# Altium PCB I3G模块.PcbDoc
Units mil, origin at the board's own origin, x right, y up, seen from the top; angles counter-clockwise.
Board outline 1074.96 x 1138.89 mil, 2 copper layers (Top Layer, Bottom Layer); 20 components, 17 nets, 67 pads, 22 vias.
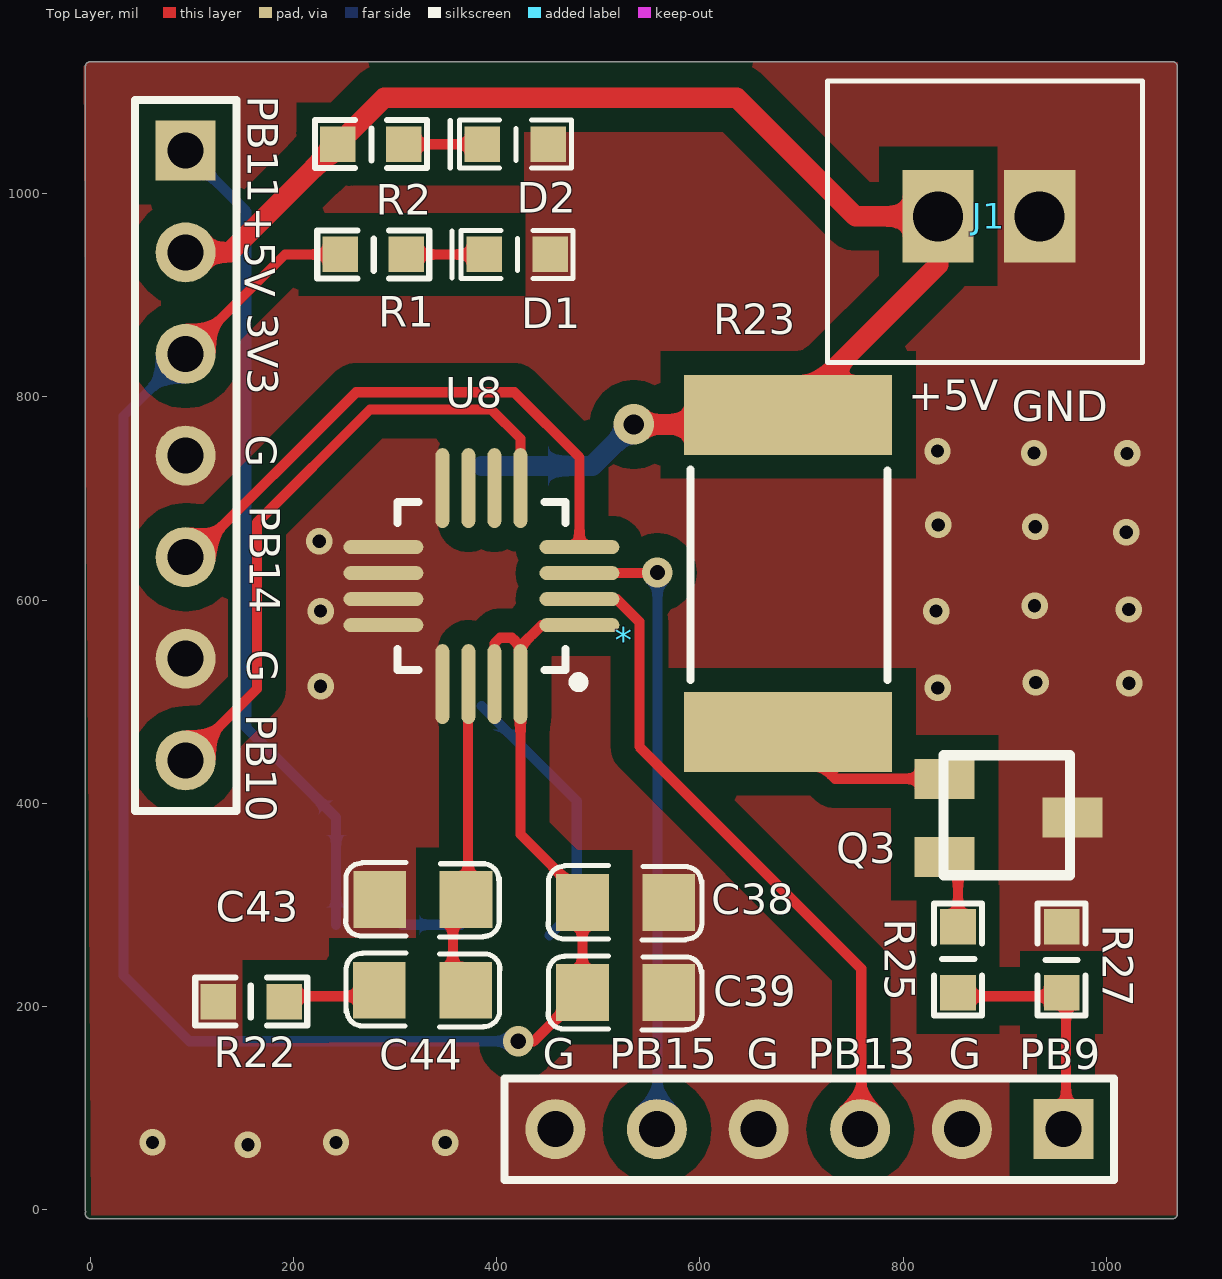
[diagram p0: Top Layer view]
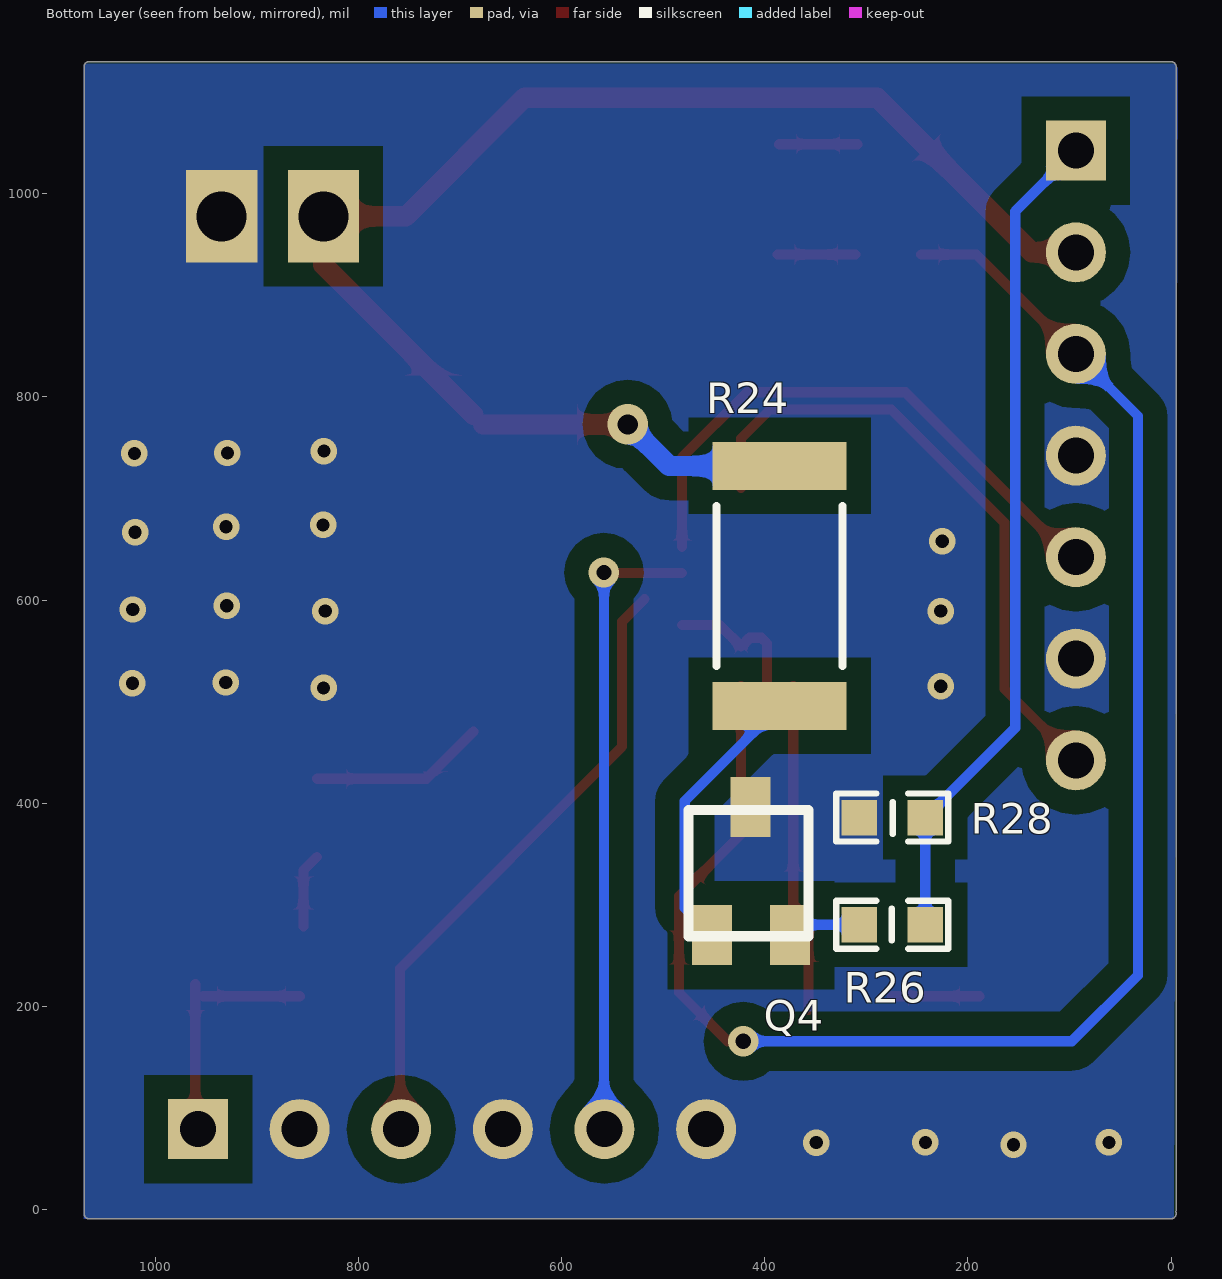
[diagram p1: Bottom Layer view, seen from below]
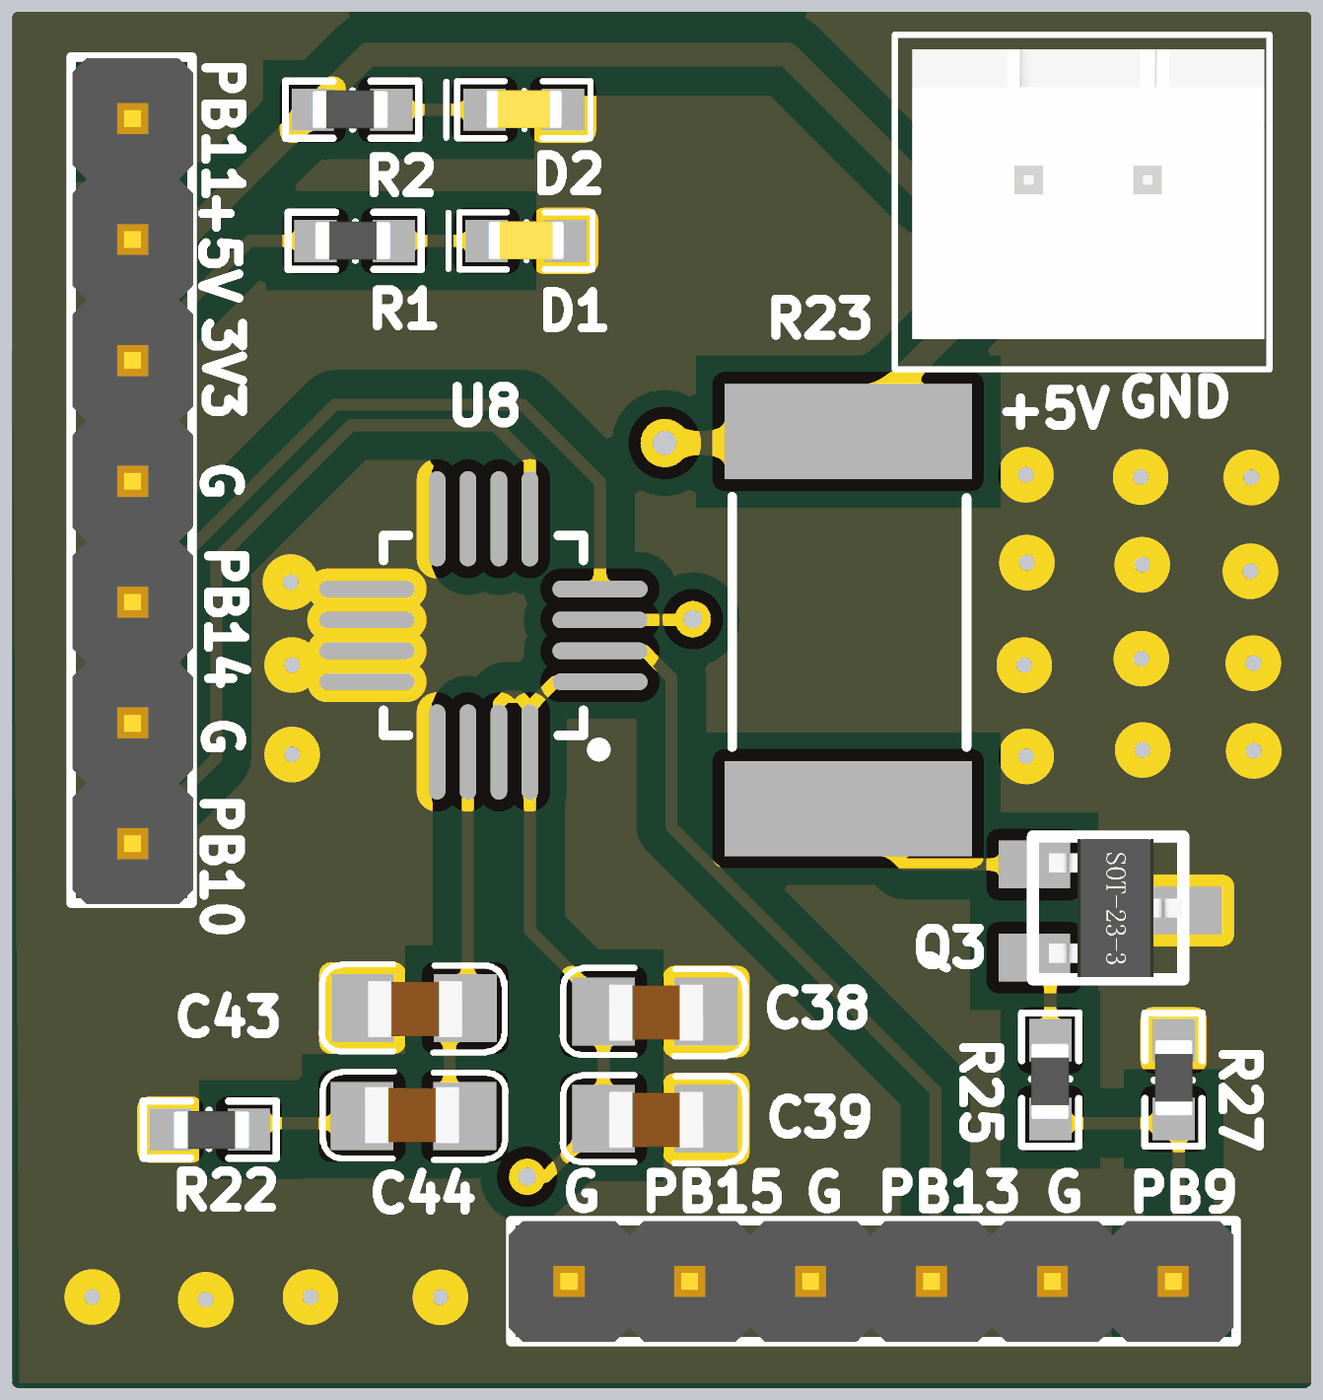
[diagram p2: 3D render of the assembled board from above, using the file's embedded part models]
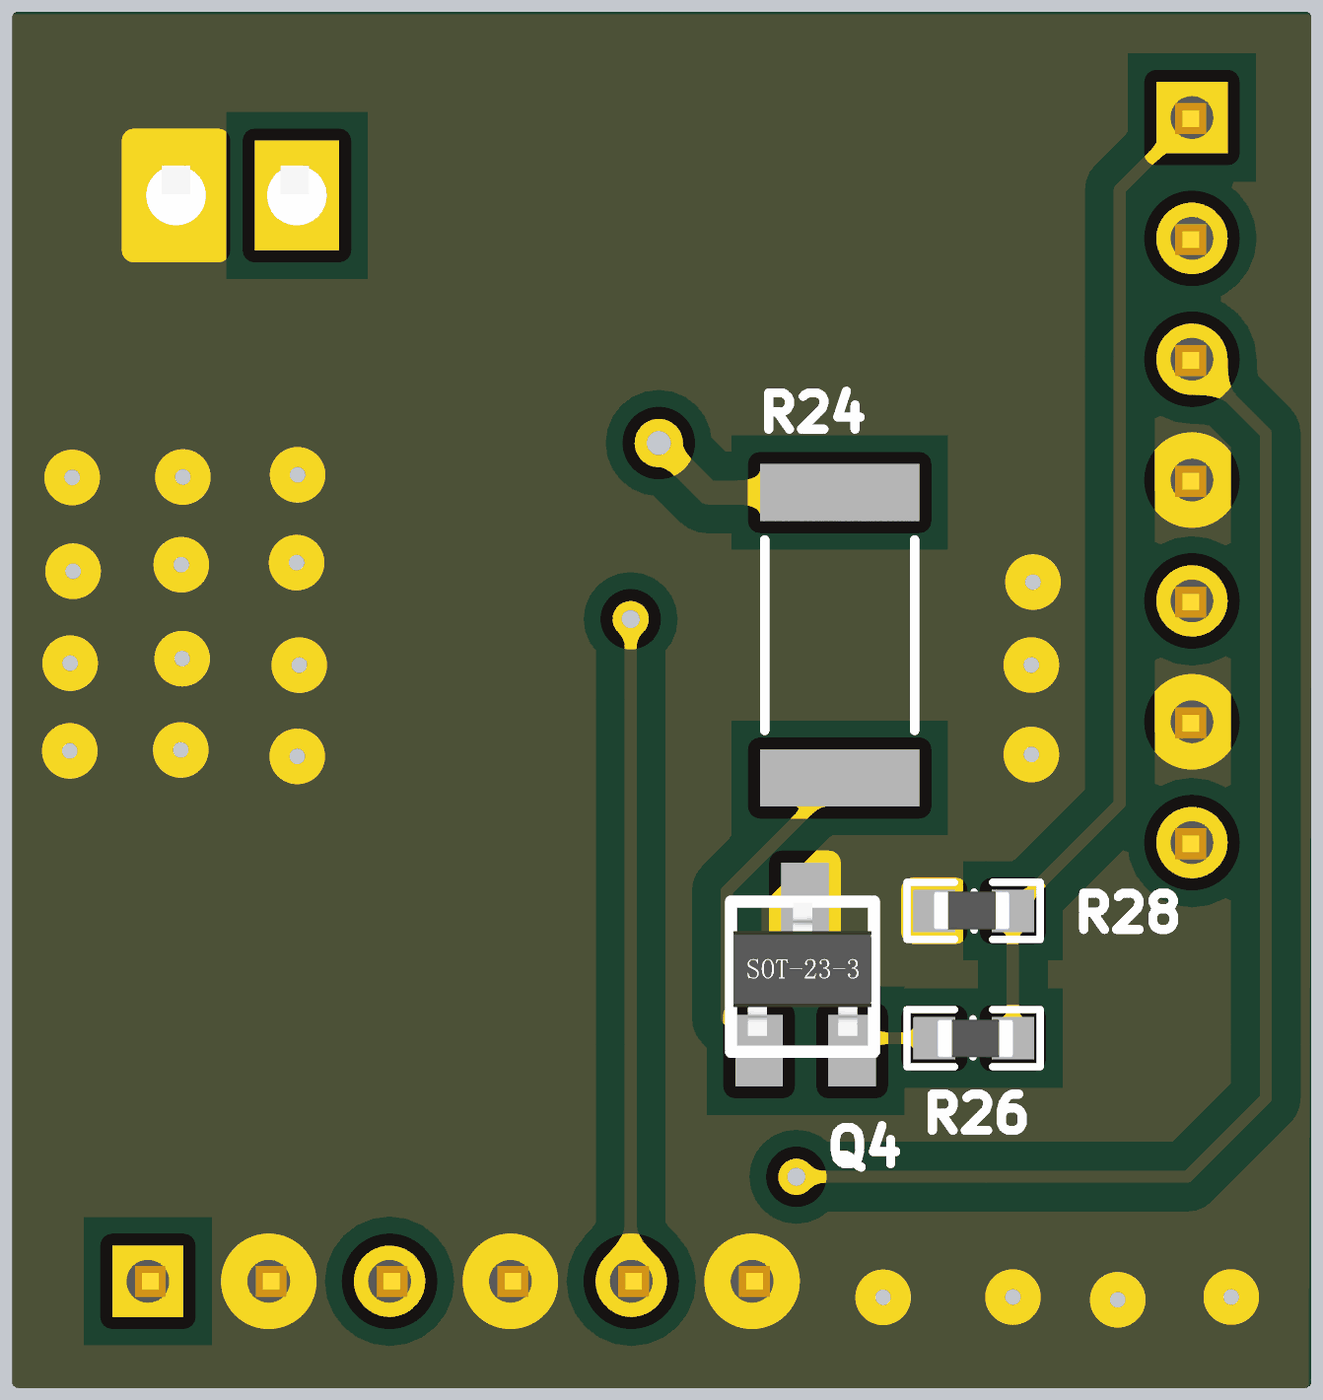
[diagram p3: 3D render of the assembled board from below, using the file's embedded part models]

## Layer stack, top to bottom
Top Solder: solder mask 0.4, Solder Resist, Dk 3.5
Top Layer: signal copper 1.4
Dielectric 1: dielectric 12.6, FR-4, Dk 4.8
Bottom Layer: signal copper 1.4
Bottom Solder: solder mask 0.4, Solder Resist, Dk 3.5

## Board outline
-4.61,-1.98 cw(c0,0) -5.01,0 -5.01,1124.89 cw(c0,1124.89) 0,1129.91 1064.93,1129.91 cw(c1064.93,1124.89) 1069.95,1124.89 1069.95,-3.97 cw(c1064.93,-3.97) 1064.93,-8.98 0,-8.98 cw(c0,-3.97)

## Design rules (kind name [scope] priority, off if disabled: settings)
Clearance [All] p1: gap=7
HoleToHoleClearance [All] p1: gap=0 allowstackedmicrovias=TRUE
MinimumSolderMaskSliver [All] p1: minsoldermaskwidth=0
PlaneClearance [All] p1: clearance=24
PlaneConnect [All] p1: planeconnectstyle=Direct reliefexpansion=20 reliefentries=4 reliefconductorwidth=10 reliefairgap=10
PolygonConnect [All] p1: connectstyle=Direct reliefconductorwidth=10 reliefentries=4 polygonreliefangle="90 Angle" airgapwidth=10
RoutingVias [All] p1: holewidth=13 width=20 viastyle="Through Hole" minholewidth=13 minwidth=20 maxholewidth=50 maxwidth=50
SilkToSilkClearance [All] p1: silktosilkclearance=0
SilkToSolderMaskClearance [IsPad] p1: minsilkscreentomaskgap=0 clearancetoexposedcopper=TRUE
SolderMaskExpansion [All] p1: expansion=10
Width [All] p1: maxlimit=20 minlimit=10 preferedwidth=10
24 further rules are at their usual default settings.

## Components (designator, comment, footprint, x,y, rotation, side; value= is the part's Value field where it differs from the comment)
* "mems小板底座" mems小板底座 193.7,42.25 r270 top
C38 "104" C-0805C 604.86,263.58 r180 top
C39 "104" C-0805C 604.86,174.87 r180 top
C43 "104" C-0805C 405.44,266.49 r180 top
C44 "104" C-0805C 248.81,254.78 r0 top
D1 "" D-0603D 361.89,966.57 r0 top
D2 "1N4148" D-0603D 360.16,1075.1 r0 top
J1 "J-2PIN" J-2-2.54-xh 987.4,974.73 r180 top
Q3 "S8050" SOT-233-3 861.71,396.12 r270 top
Q4 "S8050" SOT-233-3 423.92,291.14 r180 bottom
R1 "Value" R-0603R 220.9,965.17 r0 top
R2 "Value" R-0603R 218.64,1073.7 r0 top
R22 "10K" R-0603R 215.85,179.75 r180 top
R23 "30欧 2512" R-3925R（锰铜） 679.72,619.38 r90 top
R24 "30欧 2512" PCBComponent_1 380.02,620.37 r270 bottom
R25 "330欧" R-0603R 829.01,188.66 r90 top
R26 "330欧" R-0603R 216.93,255.45 r0 bottom
R27 "10K" R-0603R 980.98,303.66 r270 top
R28 "10K" R-0603R 331.93,410.81 r180 bottom
U8 "I3G4250D" I3G4250D 400.93,602.73 r180 top

## Footprints (in the part's own frame and the unit in brackets; to place one, negate y for a bottom-side part, rotate by r counter-clockwise, add the part's x,y. Pads: shape width x height; smd on the part's side, far side on the other; paste and mask are expansions set on the pad)
C-0805C [mil]
  rect 52x56 smd: 1(35.6,-38.84) 2(120.6,-38.84)
  silkscreen extent 3,-75 155,-2, body extent 38,-62 116,-14, height 37
D-0603D [mil]
  rect 35x35 smd: 1(25.62,-26.4) 2(90.62,-26.4)
  silkscreen extent -6,-50 113,-3, body extent 3,-50 113,-3, height 10
I3G4250D [mm]
  oval 2x0.35 smd: 1(-2.044,0.696) 2(-2.044,0.046) 3(-2.044,-0.604) 4(-2.044,-1.254) 9(2.856,-1.254) 10(2.856,-0.604) 11(2.856,0.046) 12(2.856,0.696)
  oval 0.35x2 smd: 5(-0.569,-2.729) 6(0.081,-2.729) 7(0.731,-2.729) 8(1.381,-2.729) 13(1.381,2.171) 14(0.731,2.171) 15(0.081,2.171) 16(-0.569,2.171)
  silkscreen extent -2.14,-2.38 2.51,2.25, body extent -1.67,-2.35 2.48,1.8, height 1.1
J-2-2.54-xh [mil]
  rect 70x90.75 hole 49.21: 1(53,-3) 2(153,-3)
  silkscreen extent -48,-136 262,141, body extent -44,-124 248,116, height 293
mems小板底座 [mm]
  rect 1.5x1.5 hole 0.9: 1(-25.4,-2.54) 13(-0.94,19.406)
  round 1.5 hole 0.9: 2(-22.86,-2.54) 3(-20.32,-2.54) 4(-17.78,-2.54) 5(-15.24,-2.54) 6(-12.7,-2.54) 7(-10.16,-2.54) 8(-0.94,6.706) 9(-0.94,9.246) 10(-0.94,11.786) 11(-0.94,14.326) 12(-0.94,16.866)
  silkscreen extent -26.67,-3.81 0.33,20.68, body extent -26.64,-3.78 0.33,20.62, height 10.1
PCBComponent_1 [mm]
  rect 1.2x3.35 smd: 1(3.166,-0.132) 2(-2.834,-0.132)
  silkscreen extent -1.83,-1.71 2.17,1.44, body extent -3.01,-1.74 3.34,1.48, height 0.65
R-0603R [mil]
  rect 35x35 smd: 1(25,-25) 2(90,-25)
  silkscreen extent 2,-49 113,-1, body extent 24,-40 87,-9, height 15
R-3925R（锰铜） [mil]
  rect 78.74x204.72 smd: 1(-149,-7) 2(163,-7)
  silkscreen extent -98,-105 109,89, body extent -138,-102 175,89, height 15
SOT-233-3 [mil]
  rect 39.37x59.06 smd: 1(-28,-21) 2(49,-21) 3(10,105)
  silkscreen extent -51,-22 67,102, body extent -49,-9 65,101, height 47

## Part data
C38 C39 C43 C44: library part C-贴片电容, "Capacitor"
D1 D2: library part D-发光二极管, "Default Diode"
J1: "SOCKET"
Q3 Q4: library part NPN, "NPN Bipolar Transistor"
R1 R2: library part Resistor-1, "Resistor"
R22: library part Resistor
R23 R24 R25 R26 R27 R28: library part "Res Semi", "Semiconductor Resistor"
U8: "gyroscope"

## Via types
v1: diameter 26, hole 13, Top Layer to Bottom Layer, 19 vias
v2: diameter 30, hole 15, Top Layer to Bottom Layer, 2 vias
v3: diameter 40, hole 20, Top Layer to Bottom Layer, 1 vias

## Nets (pads, with @x,y where several pads share a name; then routed paths per layer and width w, separated by ;. In a path a pad name is that pad's centre, name@x,y a point inside that pad or via, vN(x,y) a via of type N, cw(c..) or ccw(c..) an arc to the next point about the centre after c; other vN are vias at no path point)
3V3: *.3 C38.2 C39.2 R1.1 U8.1 U8.15 U8.16 | length 1793.2
  Top Layer w10: *.3 191.62,940.17 R1.1 ; U8.15 397.73,557.38 403.25,562.9 414.9,562.9 423.32,554.49 444.18,575.35 U8.1 ; v2(421.09,165.72) 436.27,165.72 C39.2 C38.2 484.26,308.47 423.32,369.4 U8.16@423.32,515.42
  Bottom Layer w10: *.3 32.62,781.17 32.62,230.7 97.61,165.72 v2(421.09,165.72)
+5V: *.2 J1.2 R2.1 R23.2 R24.2 | length 1417.4
  Top Layer w20: *.2 137.19,942.25 R2.1 289.24,1094.3 636.43,1094.3 753,977.73 J1.2 834.4,930.06 R23.2 ; v3(534.92,772.88) R23.2@677.22,772.88
  Bottom Layer w20: R24.2 493.99,731.95 v3(534.92,772.88)
GND: *.4 *.6 *.8 *.10 *.12 C38.1 C39.1 C43.2 D1.2 D2.2 J1.1 Q3.3 Q4.3 R22.2 R27.1 R28.1 U8.8 U8.9 U8.10 U8.11 U8.12 U8.13
  other v1: 155.11,63.96 349.29,65.98 61.16,66.25 241.81,66.23 834.08,513.59 226.6,515.15 930.49,518.9 1022.36,518.14 226.6,589.19 832.44,589.1 1022.04,590.72 929.36,594.47 225.26,657.85 1019.63,666.81 930.08,672.2 834.64,673.94 928.75,744.77 1020.38,744.38 833.81,746.59
NetC43_1: C43.1 C44.2 U8.14 | length 324.4
  Top Layer w10: C44.2@356.8,196.75 C43.1@356.8,285.72 ; C43.1@357.22,286.14 357.31,286.14 371.86,300.69 U8.14@371.86,515.42
NetC44_1: C44.1 R22.1 | length 85.5
  Top Layer w10: R22.1@188.83,210.06 C44.1@274.37,210.06
NetD1_1: D1.1 R1.2 | length 76.6
  Top Layer w10: R1.2 D1.1
NetD2_1: D2.1 R2.2 | length 77.1
  Top Layer w10: R2.2 D2.1
NetQ3_1: Q3.1 R23.1 | length 173.2
  Top Layer w10: R23.1 732.98,424.12 Q3.1
NetQ3_2: Q3.2 R25.2 | length 74
  Top Layer w10: Q3.2 854.01,333.82 R25.2
NetQ4_1: Q4.1 R24.1 | length 275.4
  Bottom Layer w10: R24.1 478.72,402.24 478.72,296.94 Q4.1
NetQ4_2: Q4.2 R26.2 | length 57.7
  Bottom Layer w10: R26.2 Q4.2@364.62,280.45
PB9: *.13 R25.1 R27.2 | length 234.8
  Top Layer w10: R25.1@857.62,210.05 R27.2@952.37,210.05 ; *.13@960.4,81.94 R27.2@960.4,222
PB10: *.7 U8.5 | length 629.2
  Top Layer w10: *.7 163.88,512.43 163.88,676.15 275.32,787.59 394.72,787.59 423.32,758.99 U8.5
PB11: *.1 R26.1 R28.2 | length 823.2
  Bottom Layer w10: *.1 153.42,982.53 153.42,474.32 R28.2 R26.1
PB13: *.11 U8.2 | length 629
  Top Layer w10: U8.2@518.21,600.94 540.35,578.8 540.35,455.71 758.78,237.28 *.11@758.78,71.57
PB14: *.5 U8.4 | length 567.3
  Top Layer w10: *.5@97.16,640.07 261.68,804.59 417.22,804.59 481.39,740.42 U8.4
PB15: *.9 U8.3 | length 626.3
  Top Layer w10: U8.3 558.79,626.53 v2(558.19,627.13)
  Bottom Layer w10: *.9 558.19,79.74 v2(558.19,627.13)
pads on no net: U8.6 U8.7

## Polygon pours and split planes (outlines as drawn)
GND on Bottom Layer "Top Layer-No Net" (solid, remove dead copper, pour order 30): -6.59,1127.68 1068.41,1127.68 1072.14,1131.4 1070.27,1129.54 1070.27,-9.03 -0.99,-9.03 -2.86,-7.16
GND on Top Layer "Top Layer-No Net" (solid, remove dead copper, pour order 32): -6.59,1127.68 -4.73,1129.54 1070.27,1129.54 1070.27,-3.42 1074,-7.15 1072.14,-5.29 0.88,-5.29

## Silkscreen, mask and mechanical layers (free items; w line width, h text height)
Top Overlay:
  text "PB11" at 154.78,1096.47 h30 r270
  text "+5V" at 151.99,987.35 h30 r270
  text "3V3" at 155.14,882.14 h30 r270
  text "+5V" at 804.95,786.9 h30
  text "GND" at 907.11,775.87 h30
  text "G" at 153.3,762.55 h30 r270
  text "PB14" at 156.98,692.63 h30 r270
  text "G" at 154.22,550.97 h30 r270
  text "PB10" at 153.3,487.5 h30 r270
  text "G" at 445.12,138.92 h30
  text "PB15" at 510.66,138.84 h30
  text "G" at 646.15,138.83 h30
  text "PB13" at 705.96,138.83 h30
  text "G" at 844.71,138.92 h30
  text "PB9" at 914.32,138.37 h30